# Altium PCB ESP8266_Sensor_Station_v1.0.PcbDoc
Units mm, origin at the board's own origin, x right, y up, seen from the top; angles counter-clockwise.
Board outline 57.7 x 36.9 mm, 2 copper layers (Top Layer, Bottom Layer); 50 components, 30 nets, 171 pads, 203 vias.
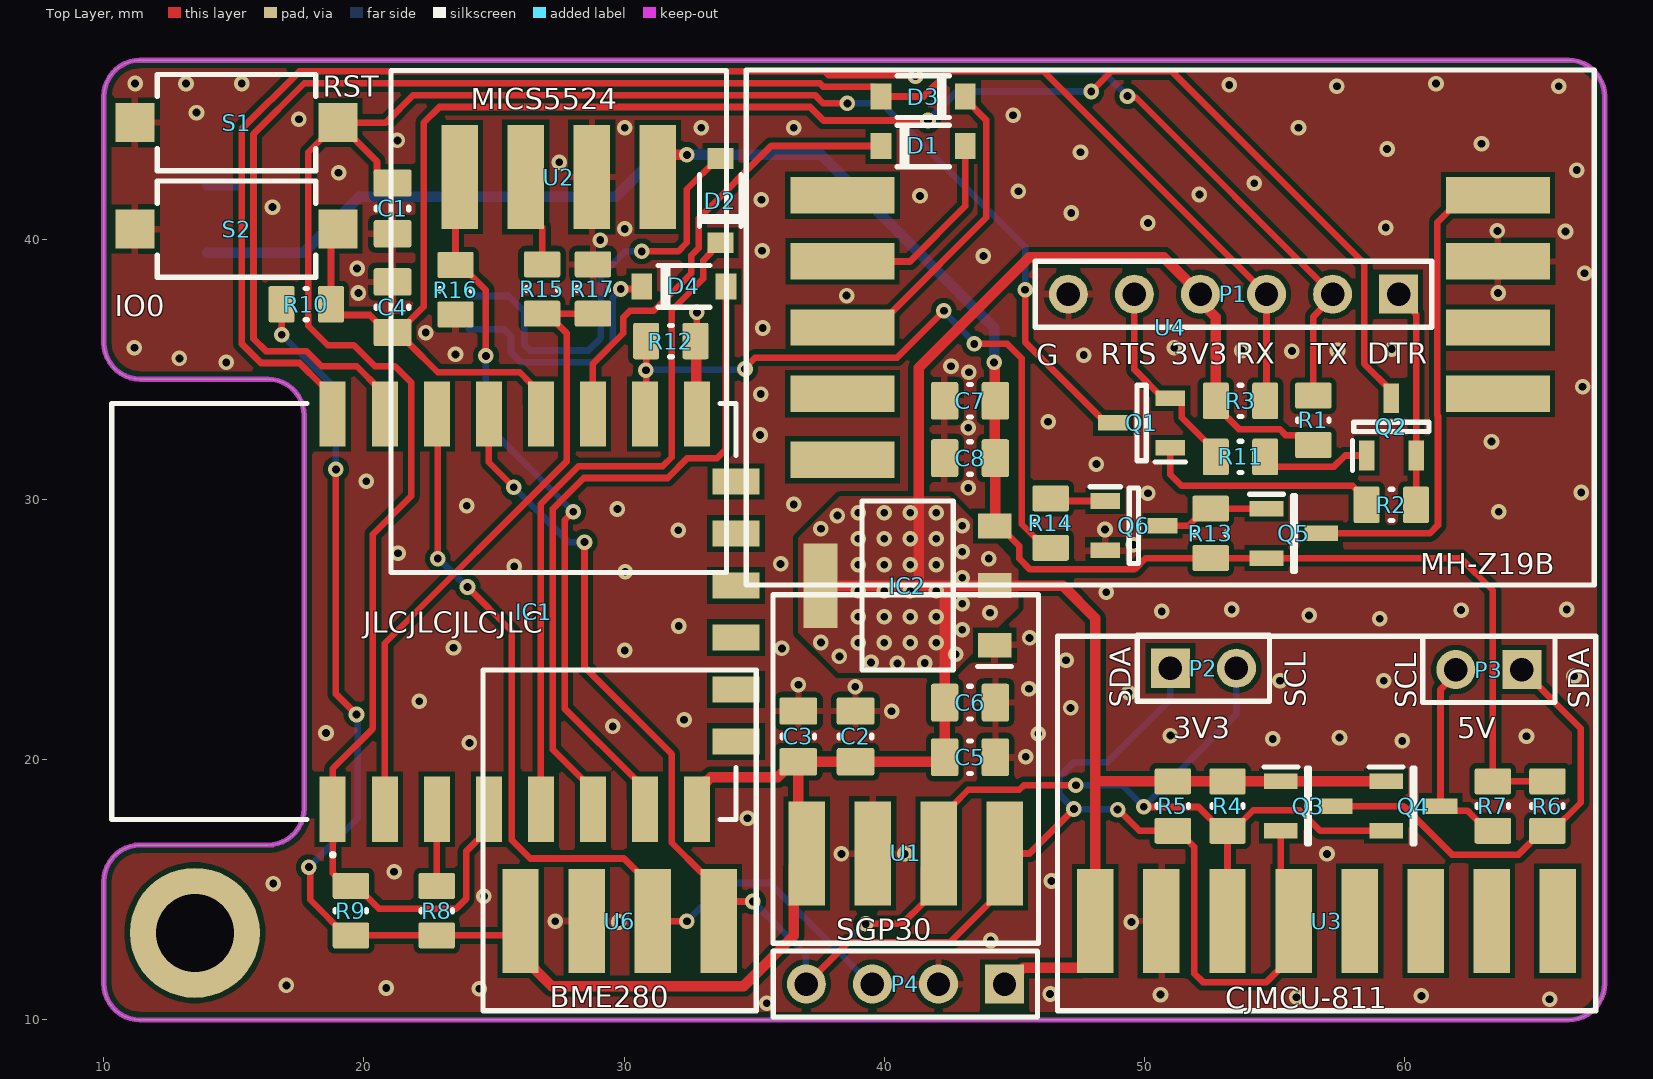
[diagram p0: Top Layer view]
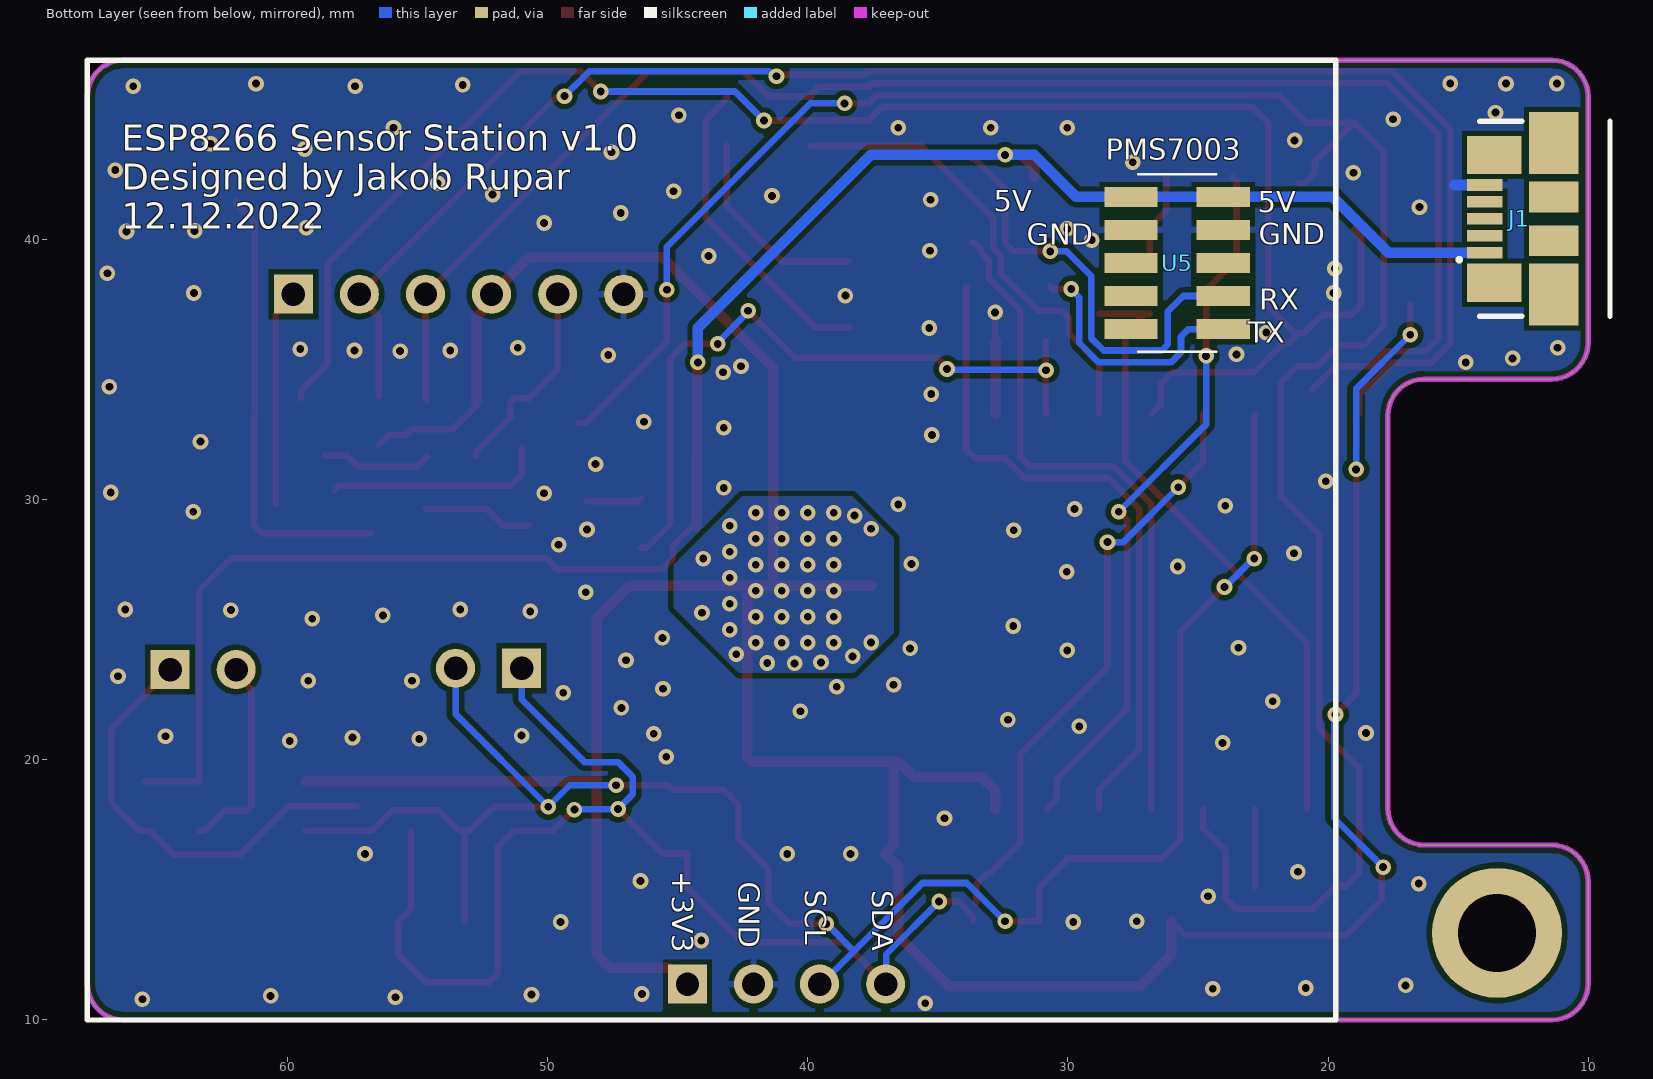
[diagram p1: Bottom Layer view, seen from below]
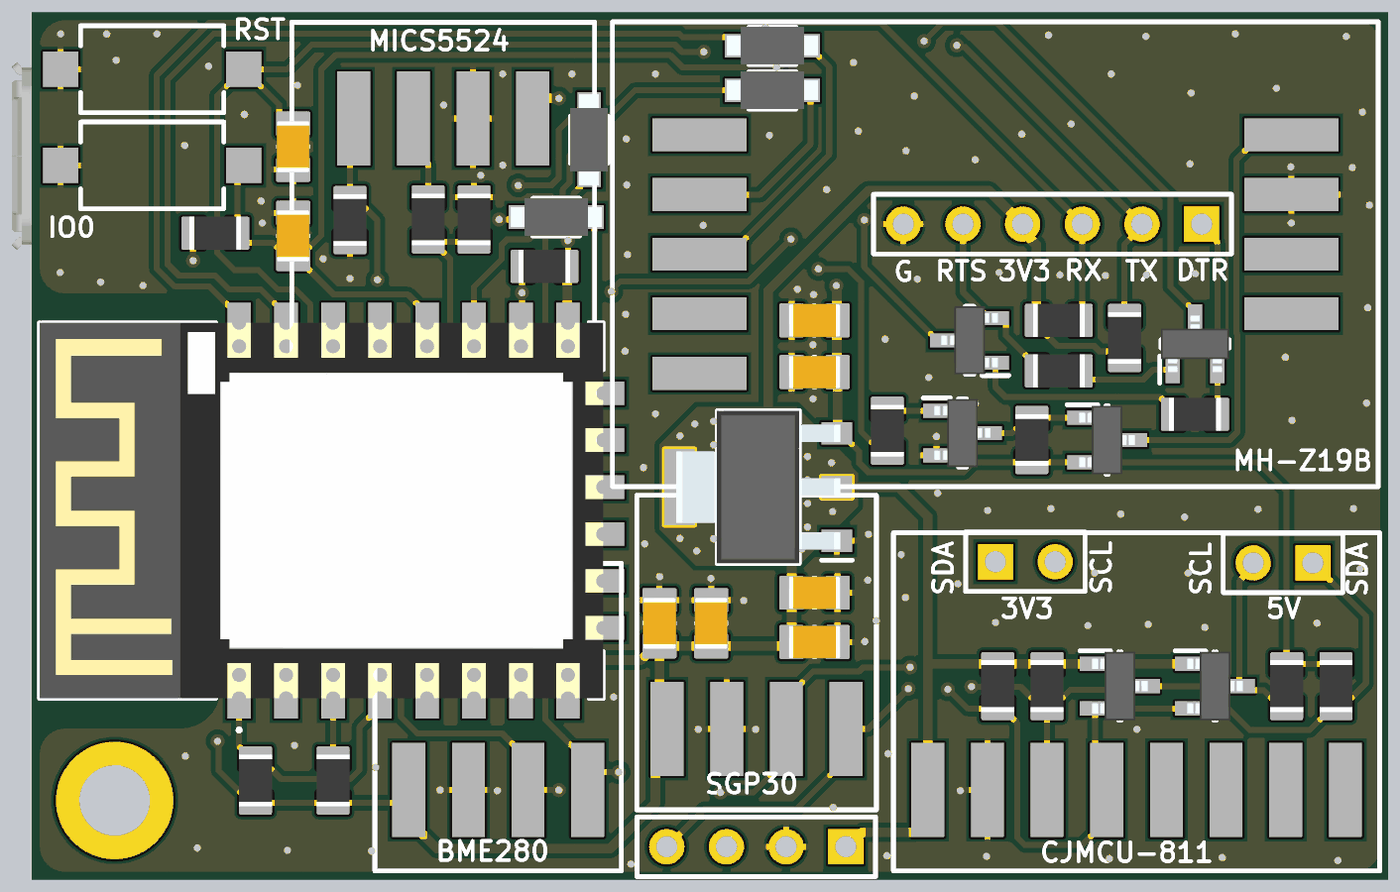
[diagram p2: 3D render of the assembled board from above, using the file's embedded part models]

## Layer stack, top to bottom
Top Solder: solder mask 0.0102, Solder Resist, Dk 3.5
Top Layer: signal copper 0.0356
Dielectric 1: dielectric 0.32, FR-4, Dk 4.8
Bottom Layer: signal copper 0.0356
Bottom Solder: solder mask 0.0102, Solder Resist, Dk 3.5

## Board outline
11.4,10 cw(c11.4,11.4) 10,11.4 10,15.325 cw(c11.4,15.325) 11.4,16.725 16.3,16.725 ccw(c16.3,18.125) 17.7,18.125 17.7,33.236 ccw(c16.3,33.236) 16.3,34.636 11.4,34.636 cw(c11.4,36.036) 10,36.036 10,45.5 cw(c11.4,45.5) 11.4,46.9 66.3,46.9 cw(c66.3,45.5) 67.7,45.5 67.7,11.4 cw(c66.3,11.4) 66.3,10 66.303,10

## Design rules (kind name [scope] priority, off if disabled: settings)
BoardOutlineClearance [All] p1: gap=0.254 ignorepadtopadclearanceinfootprint=FALSE except(0: Arc-SplitContinuation Track-SplitContinuation SMDPad-SplitContinuation THPad-SplitContinuation Via-SplitContinuation Fill-SplitContinuation Poly-SplitContinuation Region-SplitContinuation Text-SplitContinuation)
Clearance [All] p1: gap=0.203 ignorepadtopadclearanceinfootprint=FALSE except(0: Arc-Hole Track-Hole SMDPad-Hole THPad-Hole Via-Hole Fill-Hole Poly-Hole Region-Hole Text-Hole; 0.152: SMDPad-SMDPad)
ComponentClearance [All] p1 off: gap=0.254 collisioncheckmode=3 verticalgap=0.254 showdistances=FALSE
PolygonConnect PolygonConnect_1 [All vs InPolygonClass('DirectConnect')] p1: connectstyle=Direct reliefconductorwidth=0.254 reliefentries=4 polygonreliefangle="90 Angle" airgapwidth=0.254
PolygonConnect PolygonConnectVia [All vs IsVia] p2: connectstyle=Direct reliefconductorwidth=0.254 reliefentries=4 polygonreliefangle="90 Angle" airgapwidth=0.254
PolygonConnect [All] p3: connectstyle=Relief reliefconductorwidth=0.254 reliefentries=4 polygonreliefangle="90 Angle" airgapwidth=0.203
RoutingVias [All] p1: holewidth=0.3 width=0.6 viastyle="Through Hole" minholewidth=0.3 minwidth=0.6 maxholewidth=2 maxwidth=5
SolderMaskExpansion [All] p1: expansion=0.102 istentingtop=FALSE
Width [All] p1: maxlimit=2.54 minlimit=0.152 preferedwidth=0.254 minimp=50.000000 maximp=50.000000 favimp=50.000000
29 further rules are at their usual default settings.

## Classes and differential pairs
polygon class DirectConnect: +3V3_L01_P000 +3V3_L02_P001

## Components (designator, comment, footprint, x,y, rotation, side; value= is the part's Value field where it differs from the comment)
C1 "0.1 uF" C2012_0805I_N 21.1,41.2 r270 top
C2 "10 uF" C2012_0805I_N 38.9,20.9 r90 top
C3 "0.1 uF" C2012_0805I_N 36.7,20.9 r90 top
C4 "1 uF" C2012_0805I_N 21.1,37.4 r90 top
C5 "10 uF" C2012_0805I_N 43.3,20.1 r0 top
C6 "0.1 uF" C2012_0805I_N 43.3,22.2 r0 top
C7 "10 uF" C2012_0805I_N 43.3,33.8 r180 top
C8 "0.1 uF" C2012_0805I_N 43.3,31.6 r180 top
D1 "B5819W.SL" B5819WSL 41.5,43.6 r0 top
D2 "B5819W.SL" B5819WSL 33.7,41.5 r90 top
D3 "B5819W.SL" B5819WSL 41.5,45.5 r180 top
D4 "B5819W.SL" B5819WSL 32.3,38.2 r0 top
IC1 "esp-12f" esp12f 22.3,25.7 r90 top locked
IC2 "AMS1117-3.3" SOT229P700X180-4N 40.9,26.7 r180 top
J1 "47346-0001" 47346-0001 9.165,40.8 r270 bottom
P1 "" HDR1X6 59.78,37.9 r180 top
P2 "" HDR1X2 51.003,23.52 r0 top
P3 "" HDR1X2 64.516,23.47 r180 top
P4 "Header 4" HDR1X4 44.628,11.379 r180 top
Q1 "S8050" SOT95P240X110-3N 49.9,32.951 r180 top
Q2 "S8050" SOT95P240X110-3N 59.5,32.801 r90 top
Q3 "SI2302CDS-T1-E3" SOT95P237X112-3N 56.3,18.222 r0 top
Q4 "SI2302CDS-T1-E3" SOT95P237X112-3N 60.35,18.222 r0 top
Q5 "SI2301CDS-T1-GE3." SOT95P237X112-3N 55.753,28.706 r0 top
Q6 "S8050" SOT95P240X110-3N 49.6,29.001 r0 top
R1 "10k" R2012_0805I_N 56.5,33.051 r270 top
R2 "10k" R2012_0805I_N 59.5,29.801 r180 top
R3 "10k" R2012_0805I_N 53.7,33.801 r180 top
R4 "10k" R2012_0805I_N 53.2,18.222 r90 top
R5 "10k" R2012_0805I_N 51.1,18.222 r90 top
R6 "10k" R2012_0805I_N 65.5,18.222 r90 top
R7 "10k" R2012_0805I_N 63.4,18.222 r90 top
R8 "10k" R2012_0805I_N 22.8,14.2 r270 top
R9 "10k" R2012_0805I_N 19.5,14.2 r270 top
R10 "10k" R2012_0805I_N 17.784,37.516 r180 top
R11 "10k" R2012_0805I_N 53.699,31.648 r0 top
R12 "10k" R2012_0805I_N 31.8,36.1 r180 top
R13 "10k" R2012_0805I_N 52.553,28.706 r270 top
R14 "10k" R2012_0805I_N 46.4,29.101 r270 top
R15 "20k" R2012_0805I_N 26.848,38.1 r90 top
R16 "10k" R2012_0805I_N 23.52,38.075 r90 top
R17 "5k" R2012_0805I_N 28.804,38.1 r270 top
S1 "1TS002E-2500-2500-CT" 1TS002E25002500CT 15.1,44.5 r0 top
S2 "1TS002E-2500-2500-CT" 1TS002E25002500CT 15.1,40.4 r0 top
U1 "BME280" BME280 35.73,12.95 r0 top
U2 "MICS5524" MICS5524 33.94,46.5 r180 top locked
U3 "CJMCU-811" CJMCU-811 46.66,10.35 r0 top locked
U4 "MH-Z19B" MH-Z19B 34.7,46.52 r270 top locked
U5 "PMS7003" PMS7003 67.7,10 r180 bottom locked
U6 "SGP30" SGP30 24.58,10.35 r0 top locked

## Footprints (in the part's own frame and the unit in brackets; to place one, negate y for a bottom-side part, rotate by r counter-clockwise, add the part's x,y. Pads: shape width x height; smd on the part's side, far side on the other; paste and mask are expansions set on the pad)
1TS002E25002500CT [mm]
  rect 1.5x1.5 smd: 1(-3.9,0) 2(3.9,0)
  silkscreen extent -3.05,-1.85 3.05,1.85
47346-0001 [mm]
  rect 0.45x1.38 smd: 1(1.3,-4.81) 2(0.65,-4.81) 3(0,-4.81) 4(-0.65,-4.81) 5(-1.3,-4.81)
  rect 1.475x2.1 smd: 6(-2.452,-4.45) 7(2.452,-4.45)
  rect 1.175x1.9 smd: 8(0.837,-2.15) 9(-0.837,-2.15)
  rect 2.375x1.9 smd: 10(2.913,-2.15) 11(-2.913,-2.15)
  silkscreen extent -3.75,-5.84 3.75,0, body extent -3.99,-5.38 3.99,0.05, height 2.7
B5819WSL [mm]
  rect 0.8x1 smd: 1(-1.62,0) 2(1.62,0)
  silkscreen extent -1,-0.8 1,0.8, body extent -1.94,-0.8 1.94,0.8, height 1.35
BME280 [mm]
  rect 1.4x4 smd: 1(1.29,3.45) 2(3.83,3.45) 3(6.37,3.45) 4(8.91,3.45)
  silkscreen extent 0,0 10.2,13.4
C2012_0805I_N [mm] "Chip Capacitor, 2-Leads, Body 2.05x1.25mm, IPC Medium Density"
  rrect15% 1.05x1.45 smd: 1(-0.975,0) 2(0.975,0)
  silkscreen extent -0.05,-0.63 0.05,0.63, body extent -1.1,-0.7 1.1,0.7, height 1.4
CJMCU-811 [mm]
  rect 1.4x4 smd: 1(1.46,3.45) 2(4,3.45) 3(6.54,3.45) 4(9.08,3.45) 5(11.62,3.45) 6(14.16,3.45) 7(16.7,3.45) 8(19.24,3.45)
  silkscreen extent 0,0 20.7,14.4
esp12f [mm]
  rect 2.5x1 smd: 1(-7.6,3.5) 2(-7.6,1.5) 3(-7.6,-0.5) 4(-7.6,-2.5) 5(-7.6,-4.5) 6(-7.6,-6.5) 7(-7.6,-8.5) 8(-7.6,-10.5) 15(7.6,-10.5) 16(7.6,-8.5) 17(7.6,-6.5) 18(7.6,-4.5) 19(7.6,-2.5) 20(7.6,-0.5) 21(7.6,1.5) 22(7.6,3.5)
  rect 1x1.8 smd: 9(-5,-12) 10(-3,-12) 11(-1,-12) 12(1,-12) 13(3,-12) 14(5,-12)
  silkscreen extent -9.4,-12 8,12, body extent -8,-12 8,12, height 3.1
HDR1X2 [mm] "Connector; Header; 2 Position"
  rect 1.5x1.5 hole 0.9: 1(0,0)
  round 1.5 hole 0.9: 2(2.54,0)
  silkscreen extent -1.27,-1.27 3.81,1.27
HDR1X4 [mm] "Connector; Header; 4 Position"
  rect 1.5x1.5 hole 0.9: 1(0,0)
  round 1.5 hole 0.9: 2(2.54,0) 3(5.08,0) 4(7.62,0)
  silkscreen extent -1.27,-1.27 8.89,1.27
HDR1X6 [mm] "Connector; Header; 6 Position"
  rect 1.5x1.5 hole 0.9: 1(0,0)
  round 1.5 hole 0.9: 2(2.54,0) 3(5.08,0) 4(7.62,0) 5(10.16,0) 6(12.7,0)
  silkscreen extent -1.27,-1.27 13.97,1.27
MH-Z19B [mm]
  rect 1.4x4 smd: 1(4.82,3.7) 2(7.36,3.7) 3(9.9,3.7) 4(12.44,3.7) 5(14.98,3.7) 6(4.82,28.9) 7(7.36,28.9) 8(9.9,28.9) 9(12.44,28.9)
  silkscreen extent 0,0 19.8,32.6
MICS5524 [mm]
  rect 1.4x4 smd: 1(2.64,4.1) 2(5.18,4.1) 3(7.72,4.1) 4(10.26,4.1)
  silkscreen extent 0,0 12.9,19.3
PMS7003 [mm]
  rect 2.05x0.76 smd: 1(40.125,31.64) 2(43.675,31.64) 3(40.125,30.37) 4(43.675,30.37) 5(40.125,29.1) 6(43.675,29.1) 7(40.125,27.83) 8(43.675,27.83) 9(40.125,26.56) 10(43.675,26.56)
  silkscreen extent 0,0 48,36.9, body extent 39.62,25.7 44.12,32.5, height 4.5
R2012_0805I_N [mm] "Chip Resistor, 2-Leads, Body 2.05x1.25mm, IPC Medium Density"
  rrect15% 1x1.4 smd: 1(-0.95,0) 2(0.95,0)
  silkscreen extent -0.05,-0.6 0.05,0.6, body extent -1.1,-0.7 1.1,0.7, height 0.8
SGP30 [mm]
  rect 1.4x4 smd: 1(1.44,3.45) 2(3.98,3.45) 3(6.52,3.45) 4(9.06,3.45)
  silkscreen extent 0,0 10.5,13.1
SOT95P237X112-3N [mm]
  rect 1.3x0.6 smd: 1(-1.05,0.95) 2(-1.05,-0.95) 3(1.05,0)
  silkscreen extent -1.7,-1.46 0.05,1.5, body extent -1.18,-1.46 1.18,1.46, height 1.12
SOT95P240X110-3N [mm]
  rect 1.15x0.6 smd: 1(-1.1,0.95) 2(-1.1,-0.95) 3(1.1,0)
  silkscreen extent -1.68,-1.45 0.18,1.5, body extent -1.2,-1.45 1.2,1.45, height 1.1
SOT229P700X180-4N [mm]
  rect 1.3x0.95 smd: 1(-3.35,2.29) 2(-3.35,0) 3(-3.35,-2.29)
  rect 1.3x3.25 smd: 4(3.35,0)
  silkscreen extent -4,-3.25 1.75,3.25, body extent -3.5,-3.25 3.5,3.25, height 1.8

## Part data
C1 C2 C3 C4 C5 C6 C7 C8: library part C, "Capacitor"
D1 D2 D3 D4: "Schottky Diode", Manufacturer_Name=1-Avel, Datasheet Link=https://file.elecfans.com/web1/M00/8A/32/pIYBAFyLiveAInCMAAthN3CVBXo401.pdf?filename=1505718310707869662.pdf, Height=1.25mm, Manufacturer_Part_Number=B5819W.SL
IC1: "Integrated Circuit", Manufacturer_Name=Ai-Thinker, Datasheet Link=https://docs.ai-thinker.com/_media/esp8266/docs/esp-12f_product_specification_en.pdf, Height=3.1mm, Manufacturer_Part_Number=esp-12f
IC2: "Integrated Circuit", Manufacturer_Name="Advanced Monolithic Systems", Datasheet Link=http://www.advanced-monolithic.com/pdf/ds1117.pdf, Height=1.8mm, Manufacturer_Part_Number=AMS1117-3.3
J1: "Connector", Manufacturer_Name=Molex, Mouser Part Number=538-47346-0001, Datasheet Link=http://www.molex.com/pdm_docs/sd/473460001_sd.pdf, Manufacturer_Part_Number=47346-0001, Mouser Price/Stock=https://www.mouser.co.uk/ProductDetail/Molex/47346-0001?qs=c2CV6XM0DweJBWaSeyWeCw%3D%3D
P1: library part "Header 6", "Header, 6-Pin", LatestRevisionDate=17-Jul-2002, LatestRevisionNote="Re-released for DXP Platform.", Publisher="Altium Limited"
P2 P3: library part "Header 2", "Header, 2-Pin", LatestRevisionDate=17-Jul-2002, LatestRevisionNote="Re-released for DXP Platform.", Publisher="Altium Limited"
P4: "Header, 4-Pin", LatestRevisionDate=17-Jul-2002, LatestRevisionNote="Re-released for DXP Platform.", Publisher="Altium Limited"
Q1 Q2 Q6: "Transistor BJT NPN", Manufacturer_Name=Galaxy, Manufacturer_Part_Number=S8050G, Height=1.1mm
Q3 Q4: "MOSFET (N-Channel)", Manufacturer_Name=Vishay, Mouser Part Number=781-SI2302CDS-E3, Arrow Part Number=SI2302CDS-T1-E3, Arrow Price/Stock=https://www.arrow.com/en/products/si2302cds-t1-e3/vishay, Datasheet Link=https://labcenter.componentsearchengine.com/Datasheets/2/SI2302CDS-T1-E3.pdf, Height=1.12mm, Manufacturer_Part_Number=SI2302CDS-T1-E3, Mouser Price/Stock=https://www.mouser.co.uk/ProductDetail/Vishay-Semiconductors/SI2302CDS-T1-E3?qs=%252BPu8jn5UVnHNrjAmGCs%2Fuw%3D%3D
Q5: "MOSFET (P-Channel)", Manufacturer_Name=Vishay, Datasheet Link=https://www.vishay.com/doc?68741, Height=1.12mm, Manufacturer_Part_Number=SI2301CDS-T1-GE3.
R1 R2 R3 R4 R5 R6 R7 R8 R9 R10 R11 R12 R13 R14 R15 R16 R17: library part R, "R"
S1 S2: "Switch", Manufacturer_Name="HON YUAN", Datasheet Link=https://datasheet.lcsc.com/szlcsc/HYP-1TS002E-2500-2500_C329185.pdf, Height=2.7mm, Manufacturer_Part_Number=1TS002E-2500-2500-CT

## Free pads (board coordinates)
  round 5 hole 3: MH(13.5,13.35)

## Via types
v1: diameter 0.6, hole 0.3, Top Layer to Bottom Layer, tented both sides, 203 vias

## Nets (pads, with @x,y where several pads share a name; then routed paths per layer and width w, separated by ;. In a path a pad name is that pad's centre, name@x,y a point inside that pad or via, vN(x,y) a via of type N, cw(c..) or ccw(c..) an arc to the next point about the centre after c; other vN are vias at no path point)
+3V3: C2.1 C3.1 C5.1 C6.1 IC1.8 IC2.2 IC2.4 P1.4 P4.1 Q3.1 Q4.1 R1.2 R3.2 R4.2 R5.2 R8.2 R9.2 R10.2 U1.1 U3.1 U6.1 | length 141
  Top Layer w0.254: R10.2 16.834,36.582 16.852,36.565 16.852,36.354 v1(16.84,36.343) ; v1(17.882,15.875) 17.932,15.824 17.932,14.618 19.3,13.25 R9.2 R8.2 25.47,13.25 U6.1 ; v1(18.923,31.166) 18.923,22.532 v1(19.713,21.742) ; R3.2 52.75,33.601 53.636,32.715 55.206,32.715 55.446,32.474 56.127,32.474 R1.2
  Top Layer w0.406: U6.1 26.02,12.5 27.22,11.3 34.592,11.3 36.523,13.231 36.523,15.903 U1.1 36.7,16.72 C3.1 ; IC1.8 32.8,18.85 33.097,19.147 33.152,19.147 33.335,19.329 35.904,19.329 36.5,19.925 C3.1 ; IC2.4 41.38,26.7 ; P4.1@44.64,11.3 45.343,12.003 47.623,12.003 48.12,12.5 U3.1 48.12,19.202 ; R3.2 52.75,37.014 52.16,37.604 P1.4 50.741,39.319 45.571,39.319 41.33,35.077 41.33,26.751 41.38,26.7 ; Q4.1 Q3.1 R4.2 R5.2 48.15,19.172 48.12,19.202 ; C3.1 C2.1 42.15,19.925 C5.1 C6.1 42.325,26.695 42.32,26.7 ; 41.38,26.7 42.32,26.7 ; 42.32,26.7 IC2.2 46.862,26.7 48.12,25.442 48.12,19.202
  Bottom Layer w0.254: v1(16.84,36.343) 18.923,34.26 v1(18.923,31.166) ; v1(17.882,15.875) 19.761,17.755 19.761,21.694 v1(19.713,21.742)
  other v1: 40.507,23.708 41.557,23.723 39.495,23.745 38.278,23.978 42.753,24.057 37.567,24.511 39,24.5 40,24.5 41,24.5 42,24.5 43,25 39,25.5 40,25.5 41,25.5 42,25.5 44.069,25.654 43,26 39,26.5 40,26.5 41,26.5 42,26.5 43,27 39,27.5 40,27.5 41,27.5 42,27.5 44.018,27.737 43,28 39,28.5 40,28.5 41,28.5 42,28.5 37.567,28.88 43,29 38.202,29.388 39,29.5 40,29.5 41,29.5 42,29.5
+5V: C7.1 C8.1 IC2.3 J1.1 Q5.2 R6.2 R7.2 R13.2 U2.1 U5.1 U5.2 | length 74.1
  Top Layer w0.254: IC2.3 44.425,28.99 45.19,28.225 45.19,27.738 45.607,27.321 49.62,27.321 50.056,27.756 R13.2 Q5.2 62.16,27.756 63.4,26.516 R7.2 R6.2
  Top Layer w0.406: U2.1 31.3,42.759 31.797,43.256 v1(32.414,43.256) ; v1(44.225,35.281) 44.25,35.256 44.25,31.625 C8.1 44.275,29.015 IC2.3
  Bottom Layer w0.406: J1.1 17.676,39.5 19.816,41.64 U5.2 U5.1 29.68,41.64 31.297,43.256 37.57,43.256 44.225,36.601 v1(44.225,35.281)
ADC: IC1.2 R15.1 R17.2 | length 24.1
  Top Layer w0.254: IC1.2 20.8,24.479 27.791,31.471 27.791,36.406 27.12,37.078 R15.1@27.12,37.091 ; R15.1 R17.2
DTR: P1.1 Q2.2 R2.1 | length 8.4
  Top Layer w0.254: P1.1 60.403,37.277 60.403,37.175 60.45,37.128 Q2.2 R2.1
GND: C1.2 C2.2 C3.2 C4.2 C5.2 C6.2 C7.2 C8.2 IC1.15 IC2.1 J1.5 P1.6 P4.2 Q6.2 R12.1 R16.1 R17.1 S1.1 S2.1 U1.2 U2.2 U3.2 U4.7 U5.3 U5.4 U6.2 | length 5.1
  Top Layer w0.254: R12.1 32.8,36.15 v1(32.8,37.2)
  Top Layer w0.406: R12.1 32.775,36.075 32.775,33.325 IC1.15
  Bottom Layer w0.406: J1.5 15.126,42.1 15.138,42.088
  other v1: 35.484,10.643 65.583,10.795 55.855,10.871 60.655,10.922 50.622,10.973 46.38,10.998 24.435,11.201 20.853,11.227 17.018,11.328 44.094,13.056 29.794,13.767 49.505,13.767 27.356,13.792 24.613,14.757 16.51,15.24 46.431,15.342 21.158,15.697 38.354,16.383 40.792,16.383 57.023,16.383 34.747,17.755 45.441,20.117 24.054,20.65 59.919,20.726 54.94,20.803 57.506,20.853 64.694,20.904 51.003,20.93 45.923,21.006 18.542,21.031 29.566,21.285 32.309,21.539 40.284,21.869 47.168,21.996 22.123,22.25 49.403,22.581 45.568,22.733 38.887,22.809 36.703,22.885 55.22,23.038 59.207,23.038 66.523,23.216 46.99,23.825 30.023,24.206 36.068,24.282 23.444,24.308 45.593,24.689 32.106,25.146 59.055,25.425 56.337,25.552 50.673,25.705 62.179,25.756 53.365,25.781 66.243,25.781 48.539,26.441 30.048,27.229 25.781,27.432 36.017,27.534 21.311,27.94 49.581,28.27 32.08,28.829 48.489,28.854 63.627,29.54 29.743,29.642 23.952,29.769 36.525,29.82 50.14,30.251 66.802,30.277 43.231,30.455 20.091,30.709 48.158,31.369 63.348,32.233 35.23,32.487 43.231,32.766 46.304,32.995 35.255,34.061 66.853,34.341 43.256,34.9 42.57,35.128 14.707,35.281 12.903,35.433 47.676,35.56 23.52,35.585 55.677,35.712 53.746,35.738 57.429,35.738 59.512,35.789 11.176,35.839 51.156,35.839 22.377,36.424 35.331,36.601 38.557,37.846 19.787,37.948 63.602,37.948 66.929,38.71 19.736,38.887 43.815,39.37 35.306,39.573 29.083,39.98 66.192,40.31 63.576,40.335 30.023,40.411 59.284,40.462 50.14,40.64 47.193,41.021 16.485,41.25 35.281,41.529 41.377,41.681 52.121,41.732 45.161,41.859 54.229,42.164 19.025,42.57 66.624,42.672 27.508,42.977 47.549,43.358 59.334,43.485 62.967,43.688 21.285,43.815 30.023,44.298 32.969,44.298 36.525,44.298 55.931,44.298 17.501,44.628 44.958,44.78 13.564,44.882 57.404,45.898 65.938,45.898 53.264,45.949 11.2,46 13.157,45.999 15.3,46 61.214,45.999
IO0: C4.1 IC1.18 Q2.3 R10.1 S2.2 | length 68.1
  Top Layer w0.254: S2.2 18.734,40.134 R10.1 18.734,37.473 19.107,37.1 20.225,37.1 20.9,36.425 C4.1 ; IC1.18 26.427,33.673 26.427,34.461 25.988,34.9 22.838,34.9 21.711,36.027 21.498,36.027 C4.1 ; v1(41.685,44.577) 37.672,44.577 37.152,45.097 22.901,45.097 22.301,44.497 22.301,37.426 21.3,36.425 C4.1 ; v1(47.959,45.695) 48.733,46.468 51.072,46.468 58.456,39.084 58.456,35.22 59.5,34.176 Q2.3
  Bottom Layer w0.254: v1(41.685,44.577) 42.803,45.695 v1(47.959,45.695)
IO2: D1.1 IC1.17 | length 17.9
  Top Layer w0.254: IC1.17 28.8,35.226 29.972,36.398 29.972,37.008 30.226,37.262 31.144,37.262 32.585,38.703 32.585,39.388 32.87,39.673 32.87,40.816 35.654,43.6 D1.1
IO12: D4.2 IC1.6 | length 26.1
  Top Layer w0.254: IC1.6 28.8,18.85 27.257,20.393 27.257,29.643 28.45,30.836 31.678,30.836 32.44,31.598 33.583,31.598 33.92,31.935 D4.2
IO13: IC1.7 R16.2 U2.4 | length 27.8
  Top Layer w0.254: U2.4 23.52,42.24 R16.2 23.72,39.025 24.689,38.056 v1(24.689,35.53) ; v1(28.045,29.54) 27.715,29.21 27.715,21.971 30.427,19.259 30.427,18.473 IC1.7
  Bottom Layer w0.254: v1(24.689,35.53) 24.689,32.897 v1(28.045,29.54)
IO14: D2.1 IC1.5 | length 26.6
  Top Layer w0.254: IC1.5 26.8,29.833 28.26,31.293 31.488,31.293 31.83,31.635 31.83,37.287 33.042,38.499 33.042,39.199 33.327,39.484 33.327,39.607 33.6,39.88 D2.1
IO15: IC1.16 R12.2 R14.2 | length 26.9
  Top Layer w0.254: IC1.16 30.85,33.35 R12.2 ; v1(34.649,35.027) 34.649,35.077 35.03,35.458 40.491,35.458 v1(42.295,37.262) ; v1(43.463,35.992) 44.733,35.992 45.292,35.433 45.292,29.059 46.2,28.151 R14.2
  Bottom Layer w0.254: v1(30.839,34.976) 30.865,35.001 34.624,35.001 v1(34.649,35.027) ; v1(42.295,37.262) 42.295,37.211 43.463,36.043 v1(43.463,35.992)
NetD1_2: D1.2 U4.2 | length 7.9
  Top Layer w0.254: U4.2 40.993,39.16 43.12,41.287 D1.2
NetD2_2: D2.2 U5.8 | length 16.9
  Top Layer w0.254: v1(30.683,39.548) 32.084,39.548 32.413,39.876 32.413,41.933 33.6,43.12 D2.2
  Bottom Layer w0.254: U5.8 25.568,37.83 26.162,37.236 26.162,35.966 26.391,35.738 28.625,35.738 29.108,36.221 29.108,38.608 30.048,39.548 v1(30.683,39.548)
NetD3_1: D3.1 U4.3 | length 12.3
  Top Layer w0.254: U4.3 39.7,36.62 40.415,37.335 40.415,37.338 43.92,40.843 43.92,44.6 43.12,45.4 D3.1
NetD4_1: D4.1 U5.10 | length 9.8
  Top Layer w0.254: v1(29.87,38.1) 30.58,38.1 D4.1
  Bottom Layer w0.254: U5.10 25.365,36.56 25.654,36.271 25.654,35.662 26.035,35.281 28.814,35.281 29.566,36.032 29.566,37.778 29.87,38.083 v1(29.87,38.1)
NetIC1_3: IC1.3 R8.1 | length 2.9
  Top Layer w0.254: R8.1 IC1.3
NetQ1_1: Q1.1 R2.2 | length 8.5
  Top Layer w0.254: Q1.1 51,30.97 51.439,30.531 58.016,30.531 58.172,30.374 58.177,30.374 58.199,30.353 R2.2@58.199,30.348
NetQ2_1: Q2.1 R11.2 | length 4.2
  Top Layer w0.254: R11.2 54.649,31.644 55.022,31.271 57.293,31.271 57.723,31.701 Q2.1
NetQ5_1: Q5.1 Q6.3 R13.1 | length 4.3
  Top Layer w0.254: Q6.3 51.698,29.001 52.353,29.656 R13.1 Q5.1
NetQ5_3: Q5.3 U4.6 | length 17.4
  Top Layer w0.254: Q5.3 60.978,28.706 61.294,29.022 61.294,33.219 61.27,33.243 61.27,40.67 61.973,41.373 U4.6@61.973,41.499
NetQ6_1: Q6.1 R14.1 | length 2.1
  Top Layer w0.254: R14.1 46.5,29.951 Q6.1
NetR15_2: R15.2 U2.3 | length 3.6
  Top Layer w0.254: U2.3 26.22,41.1 26.848,40.472 R15.2
RST: C1.1 IC1.1 IC1.4 Q1.3 R9.1 S1.2 | length 83.8
  Top Layer w0.254: C1.1 20.9,42.175 20.502,42.573 20.502,42.998 S1.2 ; IC1.4 24.8,17.35 23.927,16.477 23.927,14.654 23.593,14.32 23.591,14.32 23.546,14.275 20.575,14.275 19.7,15.15 R9.1 19.3,15.15 18.8,15.65 IC1.1 18.8,19.664 20.343,21.206 20.343,28.67 21.822,30.15 21.822,34.495 21.189,35.128 20.425,35.128 19.613,35.941 18.608,35.941 17.86,36.689 17.86,43.36 S1.2 ; v1(38.586,45.237) 37.658,45.237 37.342,45.554 21.899,45.554 20.845,44.5 S1.2 ; v1(45.419,38.075) 45.419,36.057 48.525,32.951 Q1.3
  Bottom Layer w0.254: v1(38.586,45.237) 39.907,45.237 45.419,39.726 v1(45.419,38.075)
RTS: P1.5 Q1.2 R11.1 | length 7.9
  Top Layer w0.254: P1.5 49.62,35.006 50.725,33.901 Q1.2 51.275,33.901 51.448,33.728 51.448,33.15 52.749,31.848 R11.1
RX: D3.2 IC1.21 P1.3 R3.1 | length 61.6
  Top Layer w0.254: IC1.21@20.613,34.236 19.722,35.128 18.364,35.128 17.78,35.712 16.231,35.712 15.752,36.191 15.752,44.057 17.705,46.011 37.531,46.011 37.669,45.873 39.607,45.873 39.88,45.6 D3.2 41.516,45.5 42.484,46.468 46.132,46.468 P1.3 54.7,33.851 R3.1
SCL_3V3: IC1.20 P2.2 P4.3 Q4.2 R4.1 U1.3 U3.3 U6.3 | length 72.7
  Top Layer w0.254: IC1.20 22.838,33.262 v1(22.838,27.737) ; v1(23.981,26.645) 25.683,24.943 25.683,16.916 26.394,16.205 29.995,16.205 31.1,15.1 U6.3 31.108,13.792 v1(32.414,13.792) ; v1(39.294,13.691) 40.691,13.691 41.527,14.527 41.527,15.827 42.673,16.973 42.673,18.285 43.235,18.847 45.194,18.847 45.372,19.025 v1(47.371,19.025) ; v1(49.979,18.198) 49.991,18.186 52.086,18.186 53,17.272 R4.1 ; U3.3 R4.1 ; Q4.2 56.76,17.272 55.973,18.059 54.187,18.059 53.4,17.272 R4.1
  Bottom Layer w0.254: v1(22.838,27.737) 22.864,27.737 23.956,26.645 v1(23.981,26.645) ; v1(32.414,13.792) 33.887,15.265 35.595,15.265 38.219,12.641 ; v1(39.294,13.691) 39.268,13.691 38.219,12.641 ; P4.3@39.56,11.3 38.219,12.641 ; v1(47.371,19.025) 49.153,19.025 v1(49.979,18.198) 53.543,21.762 P2.2
SCL_5V: P3.2 Q4.3 R7.1 | length 7.9
  Top Layer w0.254: Q4.3@61.387,18.235 61.387,22.698 61.976,23.286 P3.2 ; Q4.3 61.573,18.049 62.422,18.049 62.589,17.882 ; 62.59,17.882 63.2,17.272 R7.1
SDA_3V3: IC1.19 P2.1 P4.4 Q3.2 R5.1 U1.4 U3.4 U6.4 | length 70.1
  Top Layer w0.254: IC1.19 24.8,31.439 v1(25.759,30.48) ; v1(28.477,28.372) 28.477,23.571 31.83,20.218 31.83,16.815 32.972,15.673 33.067,15.673 33.528,15.212 U6.4@33.528,14.508 ; U6.4 33.64,13.981 34.213,14.554 v1(34.954,14.554) ; P4.4 38.608,12.979 42.52,12.979 43.815,14.275 44.64,15.1 U1.4 45.588,16.4 47.295,18.106 v1(47.295,18.11) ; v1(48.975,18.085) 49,18.059 49.026,18.059 49.813,17.272 R5.1 51.3,17.272 51.921,16.651 51.921,11.786 52.252,11.455 54.695,11.455 55.74,12.5 U3.4 55.25,14.29 Q3.2
  Bottom Layer w0.254: v1(25.759,30.48) 27.868,28.372 v1(28.477,28.372) ; v1(34.954,14.554) 36.984,12.525 36.984,11.336 P4.4@37.02,11.3 ; v1(48.975,18.085) 48.962,18.098 47.307,18.098 v1(47.295,18.11) 46.736,18.669 46.736,19.355 47.295,19.914 48.59,19.914 51.003,22.327 P2.1
SDA_5V: P3.1 Q3.3 R6.1 | length 17.1
  Top Layer w0.254: Q3.3 59.963,18.222 61.827,16.358 64.386,16.358 65.3,17.272 R6.1 65.7,17.272 66.78,18.352 66.78,21.205 P3.1
TX: IC1.22 P1.2 R1.1 | length 64.1
  Top Layer w0.254: IC1.22 18.8,34.05 18.427,34.423 18.358,34.423 17.526,35.255 16.041,35.255 15.295,36.002 15.295,44.247 17.516,46.468 37.721,46.468 37.859,46.33 41.151,46.33 v1(41.203,46.279) ; v1(49.356,45.517) 49.422,45.451 49.689,45.451 P1.2 57.24,37.781 56.5,37.041 R1.1
  Bottom Layer w0.254: v1(41.203,46.279) 41.296,46.279 41.486,46.468 48.405,46.468 v1(49.356,45.517)
pads on no net: IC1.9 IC1.10 IC1.11 IC1.12 IC1.13 IC1.14 J1.2 J1.3 J1.4 J1.6 J1.7 J1.8 J1.9 J1.10 J1.11 U3.5 U3.6 U3.7 U3.8 U4.1 U4.4 U4.5 U4.8 U4.9 U5.5 U5.6 U5.7 U5.9

## Polygon pours and split planes (outlines as drawn)
GND on Top Layer "GND_L01_P002" (solid, pour order 2): 11.4,10 cw(c11.4,11.4) 10,11.4 10,15.325 cw(c11.4,15.325) 11.4,16.725 16.3,16.725 ccw(c16.3,18.125) 17.7,18.125 17.7,33.236 ccw(c16.3,33.236) 16.3,34.636 11.4,34.636 cw(c11.4,36.036) 10,36.036 10,45.5 cw(c11.4,45.5) 11.4,46.9 66.3,46.9 cw(c66.3,45.5) 67.7,45.5 67.7,11.4 cw(c66.3,11.4) 66.3,10 66.303,10
+3V3 on Top Layer "+3V3_L01_P000" (solid, pour order 0): 36.697,28.528 38.294,30.125 42.525,30.125 45.154,27.496 45.154,25.854 42.65,23.35 38.225,23.35 36.697,24.878
+3V3 on Bottom Layer "+3V3_L02_P001" (solid, pour order 1): 36.697,28.528 38.294,30.125 42.525,30.125 45.154,27.496 45.154,25.854 42.65,23.35 38.225,23.35 36.697,24.878
GND on Bottom Layer "GND_L02_P003" (solid, pour order 3): 11.4,10 cw(c11.4,11.4) 10,11.4 10,15.325 cw(c11.4,15.325) 11.4,16.725 16.3,16.725 ccw(c16.3,18.125) 17.7,18.125 17.7,33.236 ccw(c16.3,33.236) 16.3,34.636 11.4,34.636 cw(c11.4,36.036) 10,36.036 10,45.5 cw(c11.4,45.5) 11.4,46.9 66.3,46.9 cw(c66.3,45.5) 67.7,45.5 67.7,11.4 cw(c66.3,11.4) 66.3,10 66.303,10

## Keep-outs
Keep-Out Layer:
  lines w0.203: 66.3,10 ccw(c66.3,11.4) 67.7,11.4 ; 66.303,10 11.4,10 cw(c11.4,11.4) 10,11.4 10,15.325 cw(c11.4,15.325) 11.4,16.725 16.3,16.725 ccw(c16.3,18.125) 17.7,18.125 17.7,33.236 ccw(c16.3,33.236) 16.3,34.636 11.4,34.636 cw(c11.4,36.036) 10,36.036 10,45.5 cw(c11.4,45.5) 11.4,46.9 17.7,46.9 66.3,46.9 cw(c66.3,45.5) 67.7,45.5 67.7,11.397

## Silkscreen, mask and mechanical layers (free items; w line width, h text height)
Top Overlay:
  text "RST" at 18.424,45.491 h0.81
  text "MICS5524" at 24.106,45.009 h0.81
  text "IO0" at 10.423,37.059 h0.81
  text "RX" at 53.501,35.23 h0.81
  text "DTR" at 58.581,35.23 h0.81
  text "RTS" at 48.32,35.204 h0.81
  text "3V3" at 51.012,35.204 h0.81
  text "TX" at 56.397,35.204 h0.81
  text "G" at 45.856,35.179 h0.81
  text "MH-Z19B" at 60.614,27.127 h0.81
  text "JLCJLCJLCJLC" at 19.974,24.892 h0.81
  text "SCL" at 56.21,22.031 h0.81 r90
  text "SDA" at 49.479,22.005 h0.81 r90
  text "SCL" at 60.452,21.98 h0.81 r90
  text "SDA" at 67.107,21.954 h0.81 r90
  text "3V3" at 51.114,20.828 h0.81
  text "5V" at 62.036,20.828 h0.81
  text "SGP30" at 38.164,13.088 h0.81
  text "BME280" at 27.136,10.49 h0.81
  text "CJMCU-811" at 53.121,10.439 h0.81
Bottom Overlay:
  text "PMS7003" at 28.54,43.078 h0.81
  text "5V" at 32.858,41.097 h0.81
  text "5V" at 22.699,41.046 h0.81
  text "ESP8266 Sensor Station v1.0 / Designed by Jakob Rupar / 12.12.2022" at 66.37,40.411 h1
  text "GND" at 22.673,39.827 h0.81
  text "GND" at 31.589,39.802 h0.81
  text "RX" at 22.648,37.313 h0.81
  text "TX" at 23.08,36.043 h0.81
  text "+3V3" at 45.212,15.714 h0.81 r90
  text "GND" at 42.647,15.307 h0.81 r90
  text "SCL" at 40.107,15.003 h0.81 r90
  text "SDA" at 37.516,14.977 h0.81 r90